# Altium PCB zynq_dev_V1.PcbDoc (part 2 of 2)
Units mil, origin at the board's own origin, x right, y up, seen from the top; angles counter-clockwise.
Board outline 6000 x 4000 mil, 9 copper layers (Component Side, Ground Plane 1 (GND), Inner Layer 1, Inner Layer 2, Power Plane (VCC), Inner Layer 3, Mid-Layer 4, Ground Plane 2 (GND), Solder Side), stack 82.902 mil thick; 303 components, 162 nets, 1398 pads, 550 vias.
Unrouted connection lines stored in the file: 7.
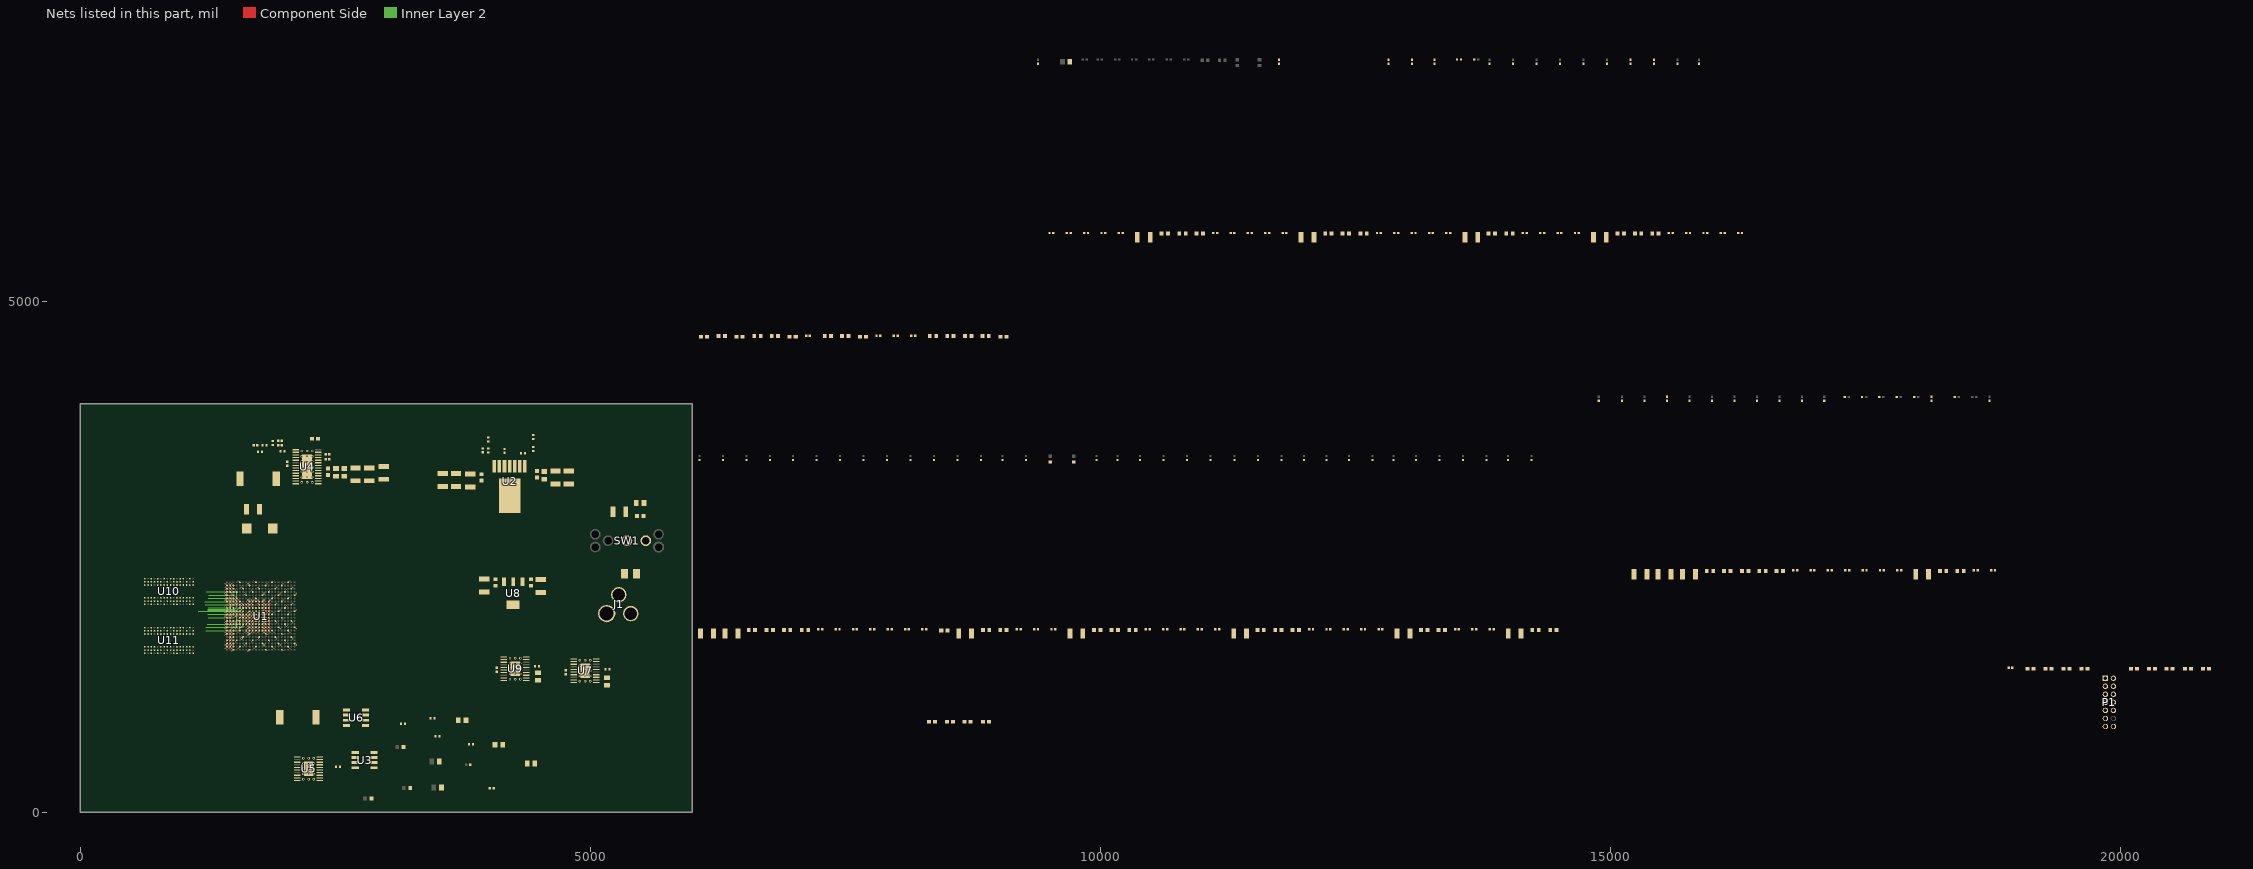
[diagram p6: the nets of this part, all layers, seen from the top]

## Via types
v1: diameter 16, hole 6, Component Side to Solder Side, 484 vias
v2: diameter 23.62, hole 11.81, Component Side to Solder Side, 66 vias

## Nets (pads, with @x,y where several pads share a name; then routed paths per layer and width w, separated by ;. In a path a pad name is that pad's centre, name@x,y a point inside that pad or via, vN(x,y) a via of type N, cw(c..) or ccw(c..) an arc to the next point about the centre after c; other vN are vias at no path point) (continued)
DDR3-A1: R4.1 U1.M5 U10.P7 U11.P7 | length 425.1
  Component Side w7: v1(1551.18,1889.76) U1.M5@1566.93,1905.51
  Inner Layer 2 w5: 1232.28,1811.02 1350.39,1811.02 1525.86,1811.02 1535.68,1820.85 1535.68,1833.19 1544.76,1842.27 1557.11,1842.27 1566.68,1851.85 1566.68,1864.69 1551.18,1880.19 v1(1551.18,1889.76)
DDR3-A2: R5.1 U1.K4 U10.P3 U11.P3 | length 296.3
  Component Side w7: v1(1519.69,1952.76) U1.K4@1535.43,1968.5
  Inner Layer 2 w5: 1252.22,1937.01 1494.36,1937.01 1510.11,1952.76 v1(1519.69,1952.76)
DDR3-A3: R6.1 U1.L4 U10.N2 U11.N2 | length 292.6
  Component Side w7: v1(1519.69,1921.26) U1.L4@1535.43,1937.01
  Inner Layer 2 w5: 1255.91,1905.51 1503.94,1905.51 v1(1519.69,1921.26)
DDR3-A4: R7.1 U1.K6 U10.P8 U11.P8 | length 551.1
  Component Side w7: v1(1582.68,1952.76) U1.K6@1598.43,1968.5
  Inner Layer 2 w5: 1232.28,1779.53 1557.35,1779.53 1566.68,1788.86 1566.68,1801.2 1576.75,1811.27 1589.1,1811.27 1598.18,1820.35 1598.18,1927.68 1582.68,1943.18 v1(1582.68,1952.76)
DDR3-A5: R8.1 U1.K5 U10.P2 U11.P2 | length 420.8
  Component Side w7: v1(1551.18,1952.76) U1.K5@1566.93,1968.5
  Inner Layer 2 w5: 1248.03,1842.52 1525.86,1842.52 1535.19,1851.85 1535.19,1936.76 v1(1551.18,1952.76)
DDR3-A6: R9.1 U1.J7 U10.R8 U11.R8 | length 498.5
  Component Side w7: v1(1614.17,2015.75) U1.J7@1629.92,2000
  Inner Layer 2 w5: 1157.48,1968.5 1566.93,1968.5 v1(1614.17,2015.75)
DDR3-A7: R11.1 U1.J6 U10.R2 U11.R2 | length 367.8
  Component Side w7: v1(1582.68,2015.75) U1.J6@1598.43,2000
  Inner Layer 2 w5: 1251.9,1980.25 1537.6,1980.25 1573.1,2015.75 v1(1582.68,2015.75)
DDR3-A8: R12.1 U1.J5 U10.T8 U11.T8 | length 332
  Component Side w7: v1(1551.18,2015.75) U1.J5@1566.93,2000
  Inner Layer 2 w5: 1252.01,1990.25 1516.11,1990.25 1541.61,2015.75 v1(1551.18,2015.75)
DDR3-A9: R13.1 U1.H5 U10.R3 U11.R3 | length 351.3
  Component Side w7: v1(1551.18,2047.24) U1.H5@1566.93,2031.5
  Inner Layer 2 w5: 1228.59,2031.74 1526.11,2031.74 1541.61,2047.24 v1(1551.18,2047.24)
DDR3-A10: R14.1 U1.J3 U10.L7 U11.L7 | length 260.7
  Component Side w7: v1(1488.19,2015.75) U1.J3@1503.94,2000
  Inner Layer 2 w5: 1256.15,2000.25 1463.11,2000.25 1478.61,2015.75 v1(1488.19,2015.75)
DDR3-A11: R15.1 U1.G5 U10.R7 U11.R7 | length 401.1
  Component Side w7: v1(1551.18,2078.74) U1.G5@1566.93,2062.99
  Inner Layer 2 w5: 1236.22,2157.48 1525.86,2157.48 1535.19,2148.15 1535.19,2094.74 v1(1551.18,2078.74)
DDR3-A12: R16.1 U1.H4 U10.N7 U11.N7 | length 324.1
  Component Side w7: v1(1519.69,2047.24) U1.H4@1535.43,2031.5
  Inner Layer 2 w5: 1224.41,2062.99 1503.94,2062.99 v1(1519.69,2047.24)
DDR3-A13: R17.1 U1.F4 U10.T3 U11.T3 | length 288.6
  Component Side w7: v1(1519.69,2110.24) U1.F4@1535.43,2094.49
  Inner Layer 2 w5: 1259.84,2125.98 1503.94,2125.98 v1(1519.69,2110.24)
DDR3-A14: R18.1 U1.G4 U10.T7 U11.T7 | length 292.6
  Component Side w7: v1(1519.69,2078.74) U1.G4@1535.43,2062.99
  Inner Layer 2 w5: 1255.91,2094.49 1503.94,2094.49 v1(1519.69,2078.74)
DDR3-BA0: R28.1 U1.L7 U10.M2 U11.M2 | length 22.3
  Component Side w7: v1(1614.17,1921.26) U1.L7@1629.92,1937.01
DDR3-BA1: R26.1 U1.L6 U10.N8 U11.N8 | length 22.3
  Component Side w7: v1(1582.68,1921.26) U1.L6@1598.43,1937.01
DDR3-BA2: R25.1 U1.M6 U10.M3 U11.M3 | length 22.3
  Component Side w7: v1(1582.68,1889.76) U1.M6@1598.43,1905.51
DDR3-CAS: R21.1 U1.P3 U10.K3 U11.K3 | length 22.3
  Component Side w7: v1(1488.19,1826.77) U1.P3@1503.94,1842.52
DDR3-CKE0: R1.1 U1.V3 U10.K9 U11.K9 | length 22.3
  Component Side w7: v1(1488.19,1700.79) U1.V3@1503.94,1716.54
DDR3-CLK0_N: R30.1 U1.N5 U10.K7 U11.K7 | length 22.3
  Component Side w7: v1(1551.18,1858.27) U1.N5@1566.93,1874.02
DDR3-CLK0_P: R30.2 U1.N4 U10.J7 U11.J7 | length 22.3
  Component Side w7: v1(1519.69,1858.27) U1.N4@1535.43,1874.02
DDR3-D0: U1.D1 U10.E3 | length 22.3
  Component Side w7: v1(1425.2,2173.23) U1.D1@1440.94,2157.48
DDR3-D1: U1.C3 U10.F7 | length 22.3
  Component Side w7: v1(1488.19,2204.72) U1.C3@1503.94,2188.98
DDR3-D2: U1.B2 U10.F2 | length 22.3
  Component Side w7: v1(1456.69,2236.22) U1.B2@1472.44,2220.47
DDR3-D3: U1.D3 U10.F8 | length 22.3
  Component Side w7: v1(1488.19,2173.23) U1.D3@1503.94,2157.48
DDR3-D4: U1.E3 U10.H3 | length 22.3
  Component Side w7: v1(1488.19,2141.73) U1.E3@1503.94,2125.98
DDR3-D5: U1.E1 U10.H8 | length 22.3
  Component Side w7: v1(1425.2,2141.73) U1.E1@1440.94,2125.98
DDR3-D6: U1.F2 U10.G2 | length 22.3
  Component Side w7: v1(1456.69,2110.24) U1.F2@1472.44,2094.49
DDR3-D7: U1.F1 U10.H7 | length 22.3
  Component Side w7: v1(1425.2,2110.24) U1.F1@1440.94,2094.49
DDR3-D8: U1.G2 U10.D7 | length 22.3
  Component Side w7: v1(1456.69,2078.74) U1.G2@1472.44,2062.99
DDR3-D9: U1.G1 U10.C3 | length 22.3
  Component Side w7: v1(1425.2,2078.74) U1.G1@1440.94,2062.99
DDR3-D10: U1.L1 U10.C8 | length 22.3
  Component Side w7: v1(1425.2,1921.26) U1.L1@1440.94,1937.01
DDR3-D11: U1.L2 U10.C2 | length 22.3
  Component Side w7: v1(1456.69,1921.26) U1.L2@1472.44,1937.01
DDR3-D12: U1.L3 U10.A7 | length 22.3
  Component Side w7: v1(1488.19,1921.26) U1.L3@1503.94,1937.01
DDR3-D13: U1.K1 U10.A2 | length 22.3
  Component Side w7: v1(1425.2,1952.76) U1.K1@1440.94,1968.5
DDR3-D14: U1.J1 U10.B8 | length 22.3
  Component Side w7: v1(1425.2,2015.75) U1.J1@1440.94,2000
DDR3-D15: U1.K3 U10.A3 | length 22.3
  Component Side w7: v1(1488.19,1952.76) U1.K3@1503.94,1968.5
DDR3-D16: U1.M1 U11.E3 | length 22.3
  Component Side w7: v1(1425.2,1889.76) U1.M1@1440.94,1905.51
DDR3-D17: U1.T3 U11.F7 | length 22.3
  Component Side w7: v1(1488.19,1763.78) U1.T3@1503.94,1779.53
DDR3-D18: U1.N3 U11.F2 | length 22.3
  Component Side w7: v1(1488.19,1858.27) U1.N3@1503.94,1874.02
DDR3-D19: U1.T1 U11.F8 | length 22.3
  Component Side w7: v1(1425.2,1763.78) U1.T1@1440.94,1779.53
DDR3-D20: U1.R3 U11.H3 | length 22.3
  Component Side w7: v1(1488.19,1795.28) U1.R3@1503.94,1811.02
DDR3-D21: U1.T2 U11.H8 | length 22.3
  Component Side w7: v1(1456.69,1763.78) U1.T2@1472.44,1779.53
DDR3-D22: U1.M2 U11.G2 | length 22.3
  Component Side w7: v1(1456.69,1889.76) U1.M2@1472.44,1905.51
DDR3-D23: U1.R1 U11.H7 | length 22.3
  Component Side w7: v1(1425.2,1795.28) U1.R1@1440.94,1811.02
DDR3-D24: U1.AA3 U11.D7 | length 22.3
  Component Side w7: v1(1488.19,1606.3) U1.AA3@1503.94,1622.05
DDR3-D25: U1.U1 U11.C3 | length 22.3
  Component Side w7: v1(1425.2,1732.28) U1.U1@1440.94,1748.03
DDR3-D26: U1.AA1 U11.C8 | length 22.3
  Component Side w7: v1(1425.2,1606.3) U1.AA1@1440.94,1622.05
DDR3-D27: U1.U2 U11.C2 | length 22.3
  Component Side w7: v1(1456.69,1732.28) U1.U2@1472.44,1748.03
DDR3-D28: U1.W1 U11.A7 | length 22.3
  Component Side w7: v1(1425.2,1669.29) U1.W1@1440.94,1685.04
DDR3-D29: U1.Y3 U11.A2 | length 22.3
  Component Side w7: v1(1488.19,1637.8) U1.Y3@1503.94,1653.54
DDR3-D30: U1.W3 U11.B8 | length 22.3
  Component Side w7: v1(1488.19,1669.29) U1.W3@1503.94,1685.04
DDR3-D31: U1.Y1 U11.A3 | length 22.3
  Component Side w7: v1(1425.2,1637.8) U1.Y1@1440.94,1653.54
DDR3-DM0: U1.B1 U10.E7 | length 22.3
  Component Side w7: v1(1425.2,2236.22) U1.B1@1440.94,2220.47
DDR3-DM1: U1.H3 U10.D3 | length 22.3
  Component Side w7: v1(1488.19,2047.24) U1.H3@1503.94,2031.5
DDR3-DM2: U1.P1 U11.E7 | length 22.3
  Component Side w7: v1(1425.2,1826.77) U1.P1@1440.94,1842.52
DDR3-DM3: U1.AA2 U11.D3 | length 22.3
  Component Side w7: v1(1456.69,1606.3) U1.AA2@1472.44,1622.05
DDR3-DQS0_N: U1.D2 U10.G3 | length 22.3
  Component Side w7: v1(1456.69,2173.23) U1.D2@1472.44,2157.48
DDR3-DQS0_P: U1.C2 U10.F3 | length 22.3
  Component Side w7: v1(1456.69,2204.72) U1.C2@1472.44,2188.98
DDR3-DQS1_N: U1.J2 U10.B7 | length 22.3
  Component Side w7: v1(1456.69,2015.75) U1.J2@1472.44,2000
DDR3-DQS1_P: U1.H2 U10.C7 | length 22.3
  Component Side w7: v1(1456.69,2047.24) U1.H2@1472.44,2031.5
DDR3-DQS2_N: U1.P2 U11.G3 | length 22.3
  Component Side w7: v1(1456.69,1826.77) U1.P2@1472.44,1842.52
DDR3-DQS2_P: U1.N2 U11.F3 | length 22.3
  Component Side w7: v1(1456.69,1858.27) U1.N2@1472.44,1874.02
DDR3-DQS3_N: U1.W2 U11.B7 | length 22.3
  Component Side w7: v1(1456.69,1669.29) U1.W2@1472.44,1685.04
DDR3-DQS3_P: U1.V2 U11.C7 | length 22.3
  Component Side w7: v1(1456.69,1700.79) U1.V2@1472.44,1716.54
DDR3-ODT0: R23.1 U1.P5 U10.K1 U11.K1 | length 22.3
  Component Side w7: v1(1551.18,1826.77) U1.P5@1566.93,1842.52
DDR3-RAS: R20.1 U1.R5 U10.J3 U11.J3 | length 22.3
  Component Side w7: v1(1551.18,1795.28) U1.R5@1566.93,1811.02
DDR3-RESET: R2.1 U1.F3 U10.T2 U11.T2 | length 22.3
  Component Side w7: v1(1488.19,2110.24) U1.F3@1503.94,2094.49
DDR3-S0: R19.1 U1.P6 U10.L2 U11.L2 | length 22.3
  Component Side w7: v1(1582.68,1826.77) U1.P6@1598.43,1842.52
DDR3-WE: R22.1 U1.R4 U10.L3 U11.L3 | length 22.3
  Component Side w7: v1(1519.69,1795.28) U1.R4@1535.43,1811.02
DDRVREF: C12.2 C13.2 C38.1 C39.1 C48.2 C49.2 U1.H7 U1.P7 U10.H1 U10.M8 U11.H1 U11.M8 | length 44.5
  Component Side w7: v1(1614.17,1826.77) U1.P7@1629.92,1842.52 ; v1(1614.17,2047.24) U1.H7@1629.92,2031.5
GND: C12.1 C13.1 C14.1 C15.1 C16.1 C17.1 C18.1 C19.1 C20.1 C21.1 C22.1 C23.1 C24.1 C25.1 C26.1 C27.1 C28.1 C29.1 C30.1 C31.1 C32.1 C33.1 C34.1 C35.1 C36.1 C37.1 C40.1 C41.1 C42.1 C43.1 C44.1 C45.1 C46.1 C47.1 C48.1 C49.1 C50.1 C51.1 C52.1 C53.1 C54.1 C55.1 C56.2 C57.2 C58.2 C59.2 C60.2 C61.2 C62.2 C63.2 C64.2 C65.2 C66.2 C67.2 C68.2 C69.2 C70.2 C71.2 C72.2 C73.2 C74.2 C75.2 C76.2 C77.2 C78.2 C79.2 C80.2 C81.2 C82.2 C83.2 C84.2 C85.2 C86.2 C87.2 C88.2 C89.2 C90.2 C91.2 C92.2 C93.2 C94.2 C95.2 C96.2 C97.2 C98.2 C99.2 C100.2 C101.2 C102.2 C103.2 C104.2 C105.2 C106.2 C107.2 C108.2 C109.2 C110.2 C111.2 C112.2 C113.2 C114.2 C115.2 C116.2 C117.2 C118.2 C119.2 C120.2 C121.2 C122.2 C123.2 C124.2 C125.2 C126.2 C127.2 C128.2 C129.2 C130.2 C131.2 C132.2 C133.2 C134.2 C135.2 C136.2 C137.2 C138.2 C139.2 C140.2 C141.2 C142.2 C143.2 C144.2 C145.2 C146.2 C147.2 C148.2 C149.2 C150.2 C151.2 C152.2 C153.2 C154.2 C155.2 C156.2 C157.2 C158.2 C159.2 C160.2 C161.2 C162.2 C163.2 C164.2 C165.2 C167.2 C168.2 C169.2 C170.2 C171.2 C172.2 C173.2 C174.2 C175.2 C176.2 C177.2 C179.1 C180.2 C181.2 C182.2 C183.2 C184.2 C185.2 C187.2 C192.2 C193.2 C194.2 C196.2 C197.2 C198.2 C199.2 C200.2 C201.2 C202.1 C203.1 C204.1 C205.1 C206.2 C207.2 C208.2 C209.2 C210.2 C211.2 C212.2 C213.2 C214.2 C215.2 C216.2 C217.2 C218.2 C219.2 C220.2 J1.2 J1.3 P1.1 P1.3 P1.5 P1.7 P1.9 P1.11 P1.13 R2.2 R10.2 R24.2 R29.2 R41.2 R42.2 R43.2 R44.1 R47.1 R48.1 R56.1 R59.1 R68.1 U1.A5 U1.A15 U1.AA5 U1.AA15 U1.AB8 U1.AB18 U1.B8 U1.B18 U1.C1 U1.C11 U1.C21 U1.D4 U1.D14 U1.E7 U1.E17 U1.F10 U1.F20 U1.G3 U1.G10 U1.H6 U1.H8 U1.H12 U1.H14 U1.H16 U1.J9 U1.J11 U1.J13 U1.J19 U1.K2 U1.K8 U1.K10 U1.K14 U1.K22 U1.L5 U1.L9 U1.L11 U1.L13 U1.L15 U1.M8 U1.M10 U1.M12 U1.M14 U1.M18 U1.N1 U1.N9 U1.N13 U1.N21 U1.P4 U1.P8 U1.P10 U1.P12 U1.P14 U1.R9 U1.R11 U1.R13 U1.R17 U1.T20 U1.U3 U1.U13 U1.V6 U1.V16 U1.W9 U1.W19 U1.Y2 U1.Y12 U1.Y22 U2.4 U2.8 U4.1 U4.15 U4.16 U4.17 U4.18 U4.19 U4.29 U5.3 U5.5 U5.6 U5.16 U5.21 U6.1 U6.2 U6.3 U7.1 U7.2 U7.3 U7.5 U7.9 U7.10 U7.11 U7.12 U7.19 U7.20 U7.21 U8.2 U8.4 U9.1 U9.2 U9.3 U9.5 U9.9 U9.10 U9.11 U9.12 U9.19 U9.20 U9.21 U10.A9 U10.B1 U10.B3 U10.B9 U10.D1 U10.D8 U10.E1 U10.E2 U10.E8 U10.F9 U10.G1 U10.G8 U10.G9 U10.J2 U10.J8 U10.M1 U10.M9 U10.P1 U10.P9 U10.T1 U10.T9 U11.A9 U11.B1 U11.B3 U11.B9 U11.D1 U11.D8 U11.E1 U11.E2 U11.E8 U11.F9 U11.G1 U11.G8 U11.G9 U11.J2 U11.J8 U11.M1 U11.M9 U11.P1 U11.P9 U11.T1 U11.T9 | length 1469.9
  Component Side w7: v1(1425.2,1858.27) U1.N1@1440.94,1874.02 ; v1(1425.2,2204.72) U1.C1@1440.94,2188.98 ; v1(1456.69,1637.8) U1.Y2@1472.44,1653.54 ; v1(1456.69,1952.76) U1.K2@1472.44,1968.5 ; v1(1488.19,1732.28) U1.U3@1503.94,1748.03 ; v1(1488.19,2078.74) U1.G3@1503.94,2062.99 ; v1(1519.69,1826.77) U1.P4@1535.43,1842.52 ; v1(1519.69,2173.23) U1.D4@1535.43,2157.48 ; v1(1551.18,1606.3) U1.AA5@1566.93,1622.05 ; v1(1551.18,1921.26) U1.L5@1566.93,1937.01 ; v1(1551.18,2267.72) U1.A5@1566.93,2251.97 ; v1(1582.68,1700.79) U1.V6@1598.43,1716.54 ; v1(1582.68,2047.24) U1.H6@1598.43,2031.5 ; v1(1614.17,2141.73) U1.E7@1629.92,2125.98 ; v1(1645.67,1574.8) U1.AB8@1661.42,1590.55 ; v1(1645.67,1826.77) U1.P8@1661.42,1842.52 ; v1(1645.67,1889.76) U1.M8@1661.42,1905.51 ; v1(1645.67,1952.76) U1.K8@1661.42,1968.5 ; v1(1645.67,2047.24) U1.H8@1661.42,2031.5 ; v1(1645.67,2236.22) U1.B8@1661.42,2220.47 ; v1(1677.17,1669.29) U1.W9@1692.91,1685.04 ; v1(1677.17,1795.28) U1.R9@1692.91,1811.02 ; v1(1677.17,1858.27) U1.N9@1692.91,1874.02 ; v1(1677.17,1921.26) U1.L9@1692.91,1937.01 ; v1(1677.17,2015.75) U1.J9@1692.91,2000 ; v1(1708.66,1826.77) U1.P10@1724.41,1842.52 ; v1(1708.66,1889.76) U1.M10@1724.41,1905.51 ; v1(1708.66,1952.76) U1.K10@1724.41,1968.5 ; v1(1708.66,2078.74) U1.G10@1724.41,2062.99 ; v1(1708.66,2110.24) U1.F10@1724.41,2094.49 ; v1(1740.16,1795.28) U1.R11@1755.91,1811.02 ; v1(1740.16,1921.26) U1.L11@1755.91,1937.01 ; v1(1740.16,2015.75) U1.J11@1755.91,2000 ; v1(1740.16,2204.72) U1.C11@1755.91,2188.98 ; U1.Y12@1787.4,1653.54 v1(1803.15,1637.8) ; U1.P12@1787.4,1842.52 v1(1803.15,1826.77) ; U1.M12@1787.4,1905.51 v1(1803.15,1889.76) ; U1.H12@1787.4,2031.5 v1(1803.15,2047.24) ; U1.U13@1818.9,1748.03 v1(1834.65,1732.28) ; U1.R13@1818.9,1811.02 v1(1834.65,1795.28) ; U1.N13@1818.9,1874.02 v1(1834.65,1858.27) ; U1.L13@1818.9,1937.01 v1(1834.65,1952.76) ; U1.J13@1818.9,2000 v1(1834.65,2015.75) ; U1.P14@1850.39,1842.52 v1(1866.14,1826.77) ; U1.M14@1850.39,1905.51 v1(1866.14,1889.76) ; U1.K14@1850.39,1968.5 v1(1866.14,1984.25) ; U1.H14@1850.39,2031.5 v1(1866.14,2047.24) ; U1.D14@1850.39,2157.48 v1(1866.14,2173.23) ; U1.AA15@1881.89,1622.05 v1(1897.64,1606.3) ; U1.L15@1881.89,1937.01 v1(1897.64,1952.76) ; U1.A15@1881.89,2251.97 v1(1897.64,2267.72) ; U1.V16@1913.39,1716.54 v1(1929.13,1700.79) ; U1.H16@1913.39,2031.5 v1(1929.13,2047.24) ; U1.R17@1944.88,1811.02 v1(1960.63,1795.28) ; U1.E17@1944.88,2125.98 v1(1960.63,2141.73) ; U1.AB18@1976.38,1590.55 v1(1992.13,1574.8) ; U1.M18@1976.38,1905.51 v1(1992.13,1889.76) ; U1.B18@1976.38,2220.47 v1(1992.13,2236.22) ; U1.W19@2007.87,1685.04 v1(2023.62,1669.29) ; U1.J19@2007.87,2000 v1(2023.62,2015.75) ; U1.T20@2039.37,1779.53 v1(2055.12,1763.78) ; U1.F20@2039.37,2094.49 v1(2055.12,2110.24) ; U1.N21@2070.87,1874.02 v1(2086.61,1858.27) ; U1.C21@2070.87,2188.98 v1(2086.61,2204.72) ; U1.Y22@2102.36,1653.54 v1(2118.11,1637.8) ; U1.K22@2102.36,1968.5 v1(2118.11,1984.25)
  other v2: 2188.82,322.64 2240,322.64 2291.18,322.64 2188.82,373.82 2240,373.82 2291.18,373.82 2188.82,425 2240,425 2291.18,425 2188.82,476.18 2240,476.18 2291.18,476.18 2188.82,527.36 2240,527.36 2291.18,527.36 4898.82,1282.64 4950,1282.64 5001.18,1282.64 4213.82,1302.64 4265,1302.64 4316.18,1302.64 4898.82,1333.82 4950,1333.82 5001.18,1333.82 4213.82,1353.82 4265,1353.82 4316.18,1353.82 4898.82,1385 4950,1385 5001.18,1385 4213.82,1405 4265,1405 4316.18,1405 4898.82,1436.18 4950,1436.18 5001.18,1436.18 4213.82,1456.18 4265,1456.18 4316.18,1456.18 4898.82,1487.36 4950,1487.36 5001.18,1487.36 4213.82,1507.36 4265,1507.36 4316.18,1507.36 2173.82,3231.46 2225,3231.46 2276.18,3231.46 2173.82,3282.64 2225,3282.64 2276.18,3282.64 2173.82,3333.82 2225,3333.82 2276.18,3333.82 2173.82,3385 2225,3385 2276.18,3385 2173.82,3436.18 2225,3436.18 2276.18,3436.18 2173.82,3487.36 2225,3487.36 2276.18,3487.36 2173.82,3538.54 2225,3538.54 2276.18,3538.54
NetC166_2: C166.2 R46.1 R48.2 U2.6
NetC171_1: C171.1 U2.5
NetC178_2: C178.2 U5.20
NetC186_2: C186.2 R55.2
NetC190_1: C190.1 L1.1 U4.7 U4.8 U4.9 U4.10 U4.11 U4.12 U4.13 U4.14
NetC190_2: C190.2 U4.5
NetC191_1: C191.1 R58.2
NetC191_2: C191.2 C195.2 U4.3
NetC193_1: C193.1 U4.26
NetC194_1: C194.1 U4.25
NetC195_1: C195.1 R53.1 R55.1 R58.1 R59.2 U4.2
NetC210_1: C210.1 C211.1 C212.1 C213.1
NetC220_1: C220.1
NetD1_1: R62.1
NetD2_1: R64.2
NetD2_2: 
NetD3_1: R67.2
NetD3_2: 
NetH1_3: R62.2
NetJ2_1: 
NetJ2_2: R63.1
NetJ2_5: 
NetJ2_7: 
NetJ2_8: 
NetJ2_9: 
NetJ2_CD: R65.1
NetJ2_WP: R66.1
NetR10_1: R10.1 U10.L8
NetR24_1: R24.1 U1.N7 | length 22.3
  Component Side w7: v1(1614.17,1858.27) U1.N7@1629.92,1874.02
NetR27_1: R27.1 U1.M7 | length 22.3
  Component Side w7: v1(1614.17,1889.76) U1.M7@1629.92,1905.51
NetR29_1: R29.1 U11.L8
NetR39_2: R39.2 U1.T14 | length 22.3
  Component Side w7: U1.T14@1850.39,1779.53 v1(1866.14,1763.78)
NetR40_2: R40.2 R41.1 U1.T13 | length 22.3
  Component Side w7: U1.T13@1818.9,1779.53 v1(1834.65,1763.78)
NetR42_1: R42.1 U1.N11 | length 22.3
  Component Side w7: v1(1740.16,1858.27) U1.N11@1755.91,1874.02
NetR43_1: R43.1 U1.N12 | length 22.3
  Component Side w7: U1.N12@1787.4,1874.02 v1(1803.15,1858.27)
NetR45_1: R45.1 R47.2 U2.3
NetR49_1: R49.1 U2.2
NetR50_1: R50.1 U5.19
NetR50_2: R50.2 U3.4
NetR51_1: R51.1 R56.2 U5.10
NetR54_1: R54.1 U5.17
NetR54_2: R54.2 U6.4
NetR57_2: R57.2 U5.15
NetR60_1: R60.1 U7.16
NetR61_1: R61.1 U9.16
NetR68_2: R68.2
NetU12_2: 
NetU12_3: 
NetU13_1: 
NetU13_3: 
NetU13_5: 
NetU13_11: 
NetU14_1: 
NetU14_3: 
NetU14_4: 
NetU14_6: 
NetU14_7: 
NetU14_9: 
PL_DONE: U1.T12 | length 22.3
  Component Side w7: U1.T12@1787.4,1779.53 v1(1803.15,1763.78)
PROG: U1.T11 | length 22.3
  Component Side w7: v1(1740.16,1763.78) U1.T11@1755.91,1779.53
PROG-RST: P1.14
PWR-GOOD: U5.13
SD_CD: R65.2
SD_WP: R66.2
SW-1V5: C178.1 L2.1 U3.1 U3.2 U3.3 U5.18 U6.5 U6.6 U6.7 U6.8
TCK: R34.1 R37.1 U1.G11 | length 22.3
  Component Side w7: v1(1740.16,2078.74) U1.G11@1755.91,2062.99
TCK-JTAG: P1.6 R37.2
TDI: R33.1 R35.1 U1.H13 | length 22.3
  Component Side w7: U1.H13@1818.9,2031.5 v1(1834.65,2047.24)
TDI-JTAG: P1.10 R35.2
TDO: R31.1 R36.1 U1.G14 | length 22.3
  Component Side w7: U1.G14@1850.39,2062.99 v1(1866.14,2078.74)
TDO-JTAG: P1.8 R36.2
TMS: R32.1 R38.1 U1.G12 | length 22.3
  Component Side w7: U1.G12@1787.4,2062.99 v1(1803.15,2078.74)
TMS-JTAG: P1.4 R38.2
VCC1V0: C56.1 C57.1 C58.1 C59.1 C60.1 C61.1 C62.1 C63.1 C64.1 C65.1 C66.1 C67.1 C68.1 C69.1 C70.1 C71.1 C72.1 C73.1 C74.1 C75.1 C76.1 C77.1 C78.1 C79.1 C80.1 C81.1 C82.1 C83.1 C84.1 C85.1 C149.1 C150.1 C151.1 C152.1 C153.1 C154.1 C155.1 C156.1 C157.1 C158.1 C159.1 C160.1 C161.1 C179.2 C186.1 C187.1 L1.2 R53.2 U1.G8 U1.H9 U1.H11 U1.J8 U1.J10 U1.J12 U1.J14 U1.K13 U1.L8 U1.L14 U1.M13 U1.N8 U1.N14 U1.P13 U1.R8 U1.R14 | length 356.3
  Component Side w7: v1(1645.67,1795.28) U1.R8@1661.42,1811.02 ; v1(1645.67,1858.27) U1.N8@1661.42,1874.02 ; v1(1645.67,1921.26) U1.L8@1661.42,1937.01 ; v1(1645.67,2015.75) U1.J8@1661.42,2000 ; v1(1645.67,2078.74) U1.G8@1661.42,2062.99 ; v1(1677.17,2047.24) U1.H9@1692.91,2031.5 ; v1(1708.66,2015.75) U1.J10@1724.41,2000 ; v1(1740.16,2047.24) U1.H11@1755.91,2031.5 ; U1.J12@1787.4,2000 v1(1803.15,2015.75) ; U1.P13@1818.9,1842.52 v1(1834.65,1826.77) ; U1.M13@1818.9,1905.51 v1(1834.65,1889.76) ; U1.K13@1818.9,1968.5 v1(1834.65,1984.25) ; U1.R14@1850.39,1811.02 v1(1866.14,1795.28) ; U1.N14@1850.39,1874.02 v1(1866.14,1858.27) ; U1.L14@1850.39,1937.01 v1(1866.14,1952.76) ; U1.J14@1850.39,2000 v1(1866.14,2015.75)
VCC1V5: FB1.2 L2.2 R51.2 U5.1 U5.9
VCC1V8: C86.1 C87.1 C88.1 C89.1 C90.1 C91.1 C92.1 C108.1 C109.1 C110.1 C111.1 C112.1 C113.1 C114.1 C115.1 C209.1 C214.1 C215.1 U1.G9 U1.K9 U1.L10 U1.M9 U1.N10 U1.P9 U1.P11 U1.R10 U1.T9 U9.13 U9.14 | length 200.4
  Component Side w7: v1(1677.17,1763.78) U1.T9@1692.91,1779.53 ; v1(1677.17,1826.77) U1.P9@1692.91,1842.52 ; v1(1677.17,1889.76) U1.M9@1692.91,1905.51 ; v1(1677.17,1952.76) U1.K9@1692.91,1968.5 ; v1(1677.17,2078.74) U1.G9@1692.91,2062.99 ; v1(1708.66,1795.28) U1.R10@1724.41,1811.02 ; v1(1708.66,1858.27) U1.N10@1724.41,1874.02 ; v1(1708.66,1921.26) U1.L10@1724.41,1937.01 ; v1(1740.16,1826.77) U1.P11@1755.91,1842.52
VCC2V5: C208.1 U7.13 U7.14
VCC3V3: C93.1 C94.1 C95.1 C96.1 C97.1 C98.1 C99.1 C100.1 C101.1 C102.1 C103.1 C104.1 C105.1 C106.1 C107.1 C116.1 C117.1 C118.1 C119.1 C120.1 C121.1 C122.1 C123.1 C124.1 C125.1 C126.1 C127.1 C128.1 C129.1 C130.1 C131.1 C132.1 C133.1 C134.1 C135.1 C136.1 C137.1 C138.1 C139.1 C140.1 C141.1 C142.1 C143.1 C144.1 C145.1 C146.1 C147.1 C148.1 C204.2 C205.2 C216.1 C217.1 C218.1 C219.1 P1.2 R31.2 R32.2 R33.2 R34.2 R39.1 R40.1 R63.2 U1.A10 U1.A20 U1.AA10 U1.AA20 U1.AB3 U1.AB13 U1.B3 U1.B13 U1.C6 U1.C16 U1.D9 U1.D19 U1.E12 U1.E22 U1.F15 U1.G18 U1.H21 U1.K17 U1.L20 U1.N16 U1.P19 U1.R12 U1.R22 U1.T5 U1.T7 U1.T8 U1.T10 U1.T15 U1.U8 U1.U18 U1.V11 U1.V21 U1.W4 U1.W14 U1.Y7 U1.Y17 U8.3 | length 801.8
  Component Side w7: v1(1488.19,1574.8) U1.AB3@1503.94,1590.55 ; v1(1488.19,2236.22) U1.B3@1503.94,2220.47 ; v1(1519.69,1669.29) U1.W4@1535.43,1685.04 ; v1(1551.18,1763.78) U1.T5@1566.93,1779.53 ; v1(1582.68,2204.72) U1.C6@1598.43,2188.98 ; v1(1614.17,1637.8) U1.Y7@1629.92,1653.54 ; v1(1614.17,1763.78) U1.T7@1629.92,1779.53 ; v1(1645.67,1732.28) U1.U8@1661.42,1748.03 ; v1(1645.67,1763.78) U1.T8@1661.42,1779.53 ; v1(1677.17,2173.23) U1.D9@1692.91,2157.48 ; v1(1708.66,1606.3) U1.AA10@1724.41,1622.05 ; v1(1708.66,1763.78) U1.T10@1724.41,1779.53 ; v1(1708.66,2267.72) U1.A10@1724.41,2251.97 ; v1(1740.16,1700.79) U1.V11@1755.91,1716.54 ; U1.R12@1787.4,1811.02 v1(1803.15,1795.28) ; U1.E12@1787.4,2125.98 v1(1803.15,2141.73) ; U1.AB13@1818.9,1590.55 v1(1834.65,1574.8) ; U1.B13@1818.9,2220.47 v1(1834.65,2236.22) ; U1.W14@1850.39,1685.04 v1(1866.14,1669.29) ; U1.T15@1881.89,1779.53 v1(1897.64,1763.78) ; U1.F15@1881.89,2094.49 v1(1897.64,2110.24) ; U1.N16@1913.39,1874.02 v1(1929.13,1858.27) ; U1.C16@1913.39,2188.98 v1(1929.13,2204.72) ; U1.Y17@1944.88,1653.54 v1(1960.63,1637.8) ; U1.K17@1944.88,1968.5 v1(1960.63,1984.25) ; U1.U18@1976.38,1748.03 v1(1992.13,1732.28) ; U1.G18@1976.38,2062.99 v1(1992.13,2078.74) ; U1.P19@2007.87,1842.52 v1(2023.62,1826.77) ; U1.D19@2007.87,2157.48 v1(2023.62,2173.23) ; U1.AA20@2039.37,1622.05 v1(2055.12,1606.3) ; U1.L20@2039.37,1937.01 v1(2055.12,1952.76) ; U1.A20@2039.37,2251.97 v1(2055.12,2267.72) ; U1.V21@2070.87,1716.54 v1(2086.61,1700.79) ; U1.H21@2070.87,2031.5 v1(2086.61,2047.24) ; U1.R22@2102.36,1811.02 v1(2118.11,1795.28) ; U1.E22@2102.36,2125.98 v1(2118.11,2141.73)
VCC3V3-A: C206.1 R61.2 U9.6 U9.7
VCC3V3-A-EN: R52.1 U4.4
VCC3V3-B: C207.1 R60.2 U7.6 U7.7
VCC3V3-B-EN: U5.11 U5.12
VCC5V0: C166.1 C167.1 C168.1 C169.1 C170.1 C176.1 C177.1 C180.1 C181.1 C182.1 C183.1 C184.1 C185.1 C201.1 C202.2 C203.2 R46.2 R52.2 R57.1 R64.1 R67.1 U2.7 U3.5 U3.6 U3.7 U3.8 U4.20 U4.21 U4.22 U4.23 U4.24 U4.27 U5.8 U5.14 U8.1
VCC_IN: C162.1 C163.1 C164.1 C165.1 C172.1 C173.1 C174.1 R45.2 R49.2 SW1.2 U2.1
VCC_JACK: C175.1 J1.1 SW1.1
VCCADC_0: U1.K11 | length 22.3
  Component Side w7: v1(1740.16,1952.76) U1.K11@1755.91,1968.5
XADC-AGND: R44.2 U1.K12 U1.L12 U1.M11 | length 66.8
  Component Side w7: v1(1740.16,1889.76) U1.M11@1755.91,1905.51 ; U1.L12@1787.4,1937.01 v1(1803.15,1952.76) ; U1.K12@1787.4,1968.5 v1(1803.15,1984.25)
pads on no net: C192.1 P1.12 SW1.0 SW1.3 U1.A1 U1.A2 U1.A3 U1.A4 U1.A6 U1.A7 U1.A8 U1.A9 U1.A11 U1.A12 U1.A13 U1.A14 U1.A16 U1.A17 U1.A18 U1.A19 U1.A21 U1.A22 U1.AA4 U1.AA6 U1.AA7 U1.AA8 U1.AA9 U1.AA11 U1.AA12 U1.AA13 U1.AA14 U1.AA16 U1.AA17 U1.AA18 U1.AA19 U1.AA21 U1.AA22 U1.AB1 U1.AB2 U1.AB4 U1.AB5 U1.AB6 U1.AB7 U1.AB9 U1.AB10 U1.AB11 U1.AB12 U1.AB14 U1.AB15 U1.AB16 U1.AB17 U1.AB19 U1.AB20 U1.AB21 U1.AB22 U1.B4 U1.B5 U1.B6 U1.B7 U1.B9 U1.B10 U1.B11 U1.B12 U1.B14 U1.B15 U1.B16 U1.B17 U1.B19 U1.B20 U1.B21 U1.B22 U1.C4 U1.C5 U1.C7 U1.C8 U1.C9 U1.C10 U1.C12 U1.C13 U1.C14 U1.C15 U1.C17 U1.C18 U1.C19 U1.C20 U1.C22 U1.D5 U1.D6 U1.D7 U1.D8 U1.D10 U1.D11 U1.D12 U1.D13 U1.D15 U1.D16 U1.D17 U1.D18 U1.D20 U1.D21 U1.D22 U1.E4 U1.E5 U1.E6 U1.E8 U1.E9 U1.E10 U1.E11 U1.E13 U1.E14 U1.E15 U1.E16 U1.E18 U1.E19 U1.E20 U1.E21 U1.F6 U1.F7 U1.F8 U1.F9 U1.F11 U1.F12 U1.F13 U1.F14 U1.F16 U1.F17 U1.F18 U1.F19 U1.F21 U1.F22 U1.G6 U1.G7 U1.G13 U1.G15 U1.G16 U1.G17 U1.G19 U1.G20 U1.G21 U1.G22 U1.H10 U1.H15 U1.H17 U1.H18 U1.H19 U1.H20 U1.H22 U1.J15 U1.J16 U1.J17 U1.J18 U1.J20 U1.J21 U1.J22 U1.K15 U1.K16 U1.K18 U1.K19 U1.K20 U1.K21 U1.L16 U1.L17 U1.L18 U1.L19 U1.L21 U1.L22 U1.M15 U1.M16 U1.M17 U1.M19 U1.M20 U1.M21 U1.M22 U1.N15 U1.N17 U1.N18 U1.N19 U1.N20 U1.N22 U1.P15 U1.P16 U1.P17 U1.P18 U1.P20 U1.P21 U1.P22 U1.R6 U1.R7 U1.R15 U1.R16 U1.R18 U1.R19 U1.R20 U1.R21 U1.T4 U1.T6 U1.T16 U1.T17 U1.T18 U1.T19 U1.T21 U1.T22 U1.U4 U1.U5 U1.U6 U1.U7 U1.U9 U1.U10 U1.U11 U1.U12 U1.U14 U1.U15 U1.U16 U1.U17 U1.U19 U1.U20 U1.U21 U1.U22 U1.V4 U1.V5 U1.V7 U1.V8 U1.V9 U1.V10 U1.V12 U1.V13 U1.V14 U1.V15 U1.V17 U1.V18 U1.V19 U1.V20 U1.V22 U1.W5 U1.W6 U1.W7 U1.W8 U1.W10 U1.W11 U1.W12 U1.W13 U1.W15 U1.W16 U1.W17 U1.W18 U1.W20 U1.W21 U1.W22 U1.Y4 U1.Y5 U1.Y6 U1.Y8 U1.Y9 U1.Y10 U1.Y11 U1.Y13 U1.Y14 U1.Y15 U1.Y16 U1.Y18 U1.Y19 U1.Y20 U1.Y21 U4.6 U4.28 U5.7 U7.4 U7.8 U7.15 U7.17 U7.18 U9.4 U9.8 U9.15 U9.17 U9.18 U10.J1 U10.J9 U10.L1 U10.L9 U10.M7 U11.J1 U11.J9 U11.L1 U11.L9 U11.M7
copper on no net: | length 5768.2
  Component Side w7: v1(1425.2,1574.8) 1440.94,1590.55 ; v1(1425.2,2267.72) 1440.94,2251.97 ; v1(1456.69,1574.8) 1472.44,1590.55 ; v1(1456.69,2267.72) 1472.44,2251.97 ; v1(1488.19,2267.72) 1503.94,2251.97 ; v1(1519.69,1574.8) 1535.43,1590.55 ; v1(1519.69,1606.3) 1535.43,1622.05 ; v1(1519.69,1637.8) 1535.43,1653.54 ; v1(1519.69,1700.79) 1535.43,1716.54 ; v1(1519.69,1732.28) 1535.43,1748.03 ; v1(1519.69,1763.78) 1535.43,1779.53 ; v1(1519.69,2141.73) 1535.43,2125.98 ; v1(1519.69,2204.72) 1535.43,2188.98 ; v1(1519.69,2236.22) 1535.43,2220.47 ; v1(1519.69,2267.72) 1535.43,2251.97 ; v1(1551.18,1574.8) 1566.93,1590.55 ; v1(1551.18,1637.8) 1566.93,1653.54 ; v1(1551.18,1669.29) 1566.93,1685.04 ; v1(1551.18,1700.79) 1566.93,1716.54 ; v1(1551.18,1732.28) 1566.93,1748.03 ; v1(1551.18,2141.73) 1566.93,2125.98 ; v1(1551.18,2173.23) 1566.93,2157.48 ; v1(1551.18,2204.72) 1566.93,2188.98 ; v1(1551.18,2236.22) 1566.93,2220.47 ; v1(1582.68,1574.8) 1598.43,1590.55 ; v1(1582.68,1606.3) 1598.43,1622.05 ; v1(1582.68,1637.8) 1598.43,1653.54 ; v1(1582.68,1669.29) 1598.43,1685.04 ; v1(1582.68,1732.28) 1598.43,1748.03 ; v1(1582.68,1763.78) 1598.43,1779.53 ; v1(1582.68,1795.28) 1598.43,1811.02 ; v1(1582.68,2078.74) 1598.43,2062.99 ; v1(1582.68,2110.24) 1598.43,2094.49 ; v1(1582.68,2141.73) 1598.43,2125.98 ; v1(1582.68,2173.23) 1598.43,2157.48 ; v1(1582.68,2236.22) 1598.43,2220.47 ; v1(1582.68,2267.72) 1598.43,2251.97 ; v1(1614.17,1574.8) 1629.92,1590.55 ; v1(1614.17,1606.3) 1629.92,1622.05 ; v1(1614.17,1669.29) 1629.92,1685.04 ; v1(1614.17,1700.79) 1629.92,1716.54 ; v1(1614.17,1732.28) 1629.92,1748.03 ; v1(1614.17,1795.28) 1629.92,1811.02 ; v1(1614.17,2078.74) 1629.92,2062.99 ; v1(1614.17,2110.24) 1629.92,2094.49 ; v1(1614.17,2173.23) 1629.92,2157.48 ; v1(1614.17,2204.72) 1629.92,2188.98 ; v1(1614.17,2236.22) 1629.92,2220.47 ; v1(1614.17,2267.72) 1629.92,2251.97 ; v1(1645.67,1606.3) 1661.42,1622.05 ; v1(1645.67,1637.8) 1661.42,1653.54 ; v1(1645.67,1669.29) 1661.42,1685.04 ; v1(1645.67,1700.79) 1661.42,1716.54 ; v1(1645.67,2110.24) 1661.42,2094.49 ; v1(1645.67,2141.73) 1661.42,2125.98 ; v1(1645.67,2173.23) 1661.42,2157.48 ; v1(1645.67,2204.72) 1661.42,2188.98 ; v1(1645.67,2267.72) 1661.42,2251.97 ; v1(1677.17,1574.8) 1692.91,1590.55 ; v1(1677.17,1606.3) 1692.91,1622.05 ; v1(1677.17,1637.8) 1692.91,1653.54 ; v1(1677.17,1700.79) 1692.91,1716.54 ; v1(1677.17,1732.28) 1692.91,1748.03 ; v1(1677.17,2110.24) 1692.91,2094.49 ; v1(1677.17,2141.73) 1692.91,2125.98 ; v1(1677.17,2204.72) 1692.91,2188.98 ; v1(1677.17,2236.22) 1692.91,2220.47 ; v1(1677.17,2267.72) 1692.91,2251.97 ; v1(1708.66,1574.8) 1724.41,1590.55 ; v1(1708.66,1637.8) 1724.41,1653.54 ; v1(1708.66,1669.29) 1724.41,1685.04 ; v1(1708.66,1700.79) 1724.41,1716.54 ; v1(1708.66,1732.28) 1724.41,1748.03 ; v1(1708.66,2047.24) 1724.41,2031.5 ; v1(1708.66,2141.73) 1724.41,2125.98 ; v1(1708.66,2173.23) 1724.41,2157.48 ; v1(1708.66,2204.72) 1724.41,2188.98 ; v1(1708.66,2236.22) 1724.41,2220.47 ; v1(1740.16,1574.8) 1755.91,1590.55 ; v1(1740.16,1606.3) 1755.91,1622.05 ; v1(1740.16,1637.8) 1755.91,1653.54 ; v1(1740.16,1669.29) 1755.91,1685.04 ; v1(1740.16,1732.28) 1755.91,1748.03 ; v1(1740.16,2110.24) 1755.91,2094.49 ; v1(1740.16,2141.73) 1755.91,2125.98 ; v1(1740.16,2173.23) 1755.91,2157.48 ; v1(1740.16,2236.22) 1755.91,2220.47 ; v1(1740.16,2267.72) 1755.91,2251.97 ; 1787.4,1590.55 v1(1803.15,1574.8) ; 1787.4,1622.05 v1(1803.15,1606.3) ; 1787.4,1685.04 v1(1803.15,1669.29) ; 1787.4,1716.54 v1(1803.15,1700.79) ; 1787.4,1748.03 v1(1803.15,1732.28) ; 1787.4,2094.49 v1(1803.15,2110.24) ; 1787.4,2157.48 v1(1803.15,2173.23) ; 1787.4,2188.98 v1(1803.15,2204.72) ; 1787.4,2220.47 v1(1803.15,2236.22) ; 1787.4,2251.97 v1(1803.15,2267.72) ; 1818.9,1622.05 v1(1834.65,1606.3) ; 1818.9,1653.54 v1(1834.65,1637.8) ; 1818.9,1685.04 v1(1834.65,1669.29) ; 1818.9,1716.54 v1(1834.65,1700.79) ; 1818.9,2062.99 v1(1834.65,2078.74) ; 1818.9,2094.49 v1(1834.65,2110.24) ; 1818.9,2125.98 v1(1834.65,2141.73) ; 1818.9,2157.48 v1(1834.65,2173.23) ; 1818.9,2188.98 v1(1834.65,2204.72) ; 1818.9,2251.97 v1(1834.65,2267.72) ; 1850.39,1590.55 v1(1866.14,1574.8) ; 1850.39,1622.05 v1(1866.14,1606.3) ; 1850.39,1653.54 v1(1866.14,1637.8) ; 1850.39,1716.54 v1(1866.14,1700.79) ; 1850.39,1748.03 v1(1866.14,1732.28) ; 1850.39,2094.49 v1(1866.14,2110.24) ; 1850.39,2125.98 v1(1866.14,2141.73) ; 1850.39,2188.98 v1(1866.14,2204.72) ; 1850.39,2220.47 v1(1866.14,2236.22) ; 1850.39,2251.97 v1(1866.14,2267.72) ; 1881.89,1590.55 v1(1897.64,1574.8) ; 1881.89,1653.54 v1(1897.64,1637.8) ; 1881.89,1685.04 v1(1897.64,1669.29) ; 1881.89,1716.54 v1(1897.64,1700.79) ; 1881.89,1748.03 v1(1897.64,1732.28) ; 1881.89,1811.02 v1(1897.64,1795.28) ; 1881.89,1842.52 v1(1897.64,1826.77) ; 1881.89,1874.02 v1(1897.64,1858.27) ; 1881.89,1905.51 v1(1897.64,1889.76) ; 1881.89,1968.5 v1(1897.64,1984.25) ; 1881.89,2000 v1(1897.64,2015.75) ; 1881.89,2031.5 v1(1897.64,2047.24) ; 1881.89,2062.99 v1(1897.64,2078.74) ; 1881.89,2125.98 v1(1897.64,2141.73) ; 1881.89,2157.48 v1(1897.64,2173.23) ; 1881.89,2188.98 v1(1897.64,2204.72) ; 1881.89,2220.47 v1(1897.64,2236.22) ; 1913.39,1590.55 v1(1929.13,1574.8) ; 1913.39,1622.05 v1(1929.13,1606.3) ; 1913.39,1653.54 v1(1929.13,1637.8) ; 1913.39,1685.04 v1(1929.13,1669.29) ; 1913.39,1748.03 v1(1929.13,1732.28) ; 1913.39,1779.53 v1(1929.13,1763.78) ; 1913.39,1811.02 v1(1929.13,1795.28) ; 1913.39,1842.52 v1(1929.13,1826.77) ; 1913.39,1905.51 v1(1929.13,1889.76) ; 1913.39,1937.01 v1(1929.13,1952.76) ; 1913.39,1968.5 v1(1929.13,1984.25) ; 1913.39,2000 v1(1929.13,2015.75) ; 1913.39,2062.99 v1(1929.13,2078.74) ; 1913.39,2094.49 v1(1929.13,2110.24) ; 1913.39,2125.98 v1(1929.13,2141.73) ; 1913.39,2157.48 v1(1929.13,2173.23) ; 1913.39,2220.47 v1(1929.13,2236.22) ; 1913.39,2251.97 v1(1929.13,2267.72) ; 1944.88,1590.55 v1(1960.63,1574.8) ; 1944.88,1622.05 v1(1960.63,1606.3) ; 1944.88,1685.04 v1(1960.63,1669.29) ; 1944.88,1716.54 v1(1960.63,1700.79) ; 1944.88,1748.03 v1(1960.63,1732.28) ; 1944.88,1779.53 v1(1960.63,1763.78) ; 1944.88,1842.52 v1(1960.63,1826.77) ; 1944.88,1874.02 v1(1960.63,1858.27) ; 1944.88,1905.51 v1(1960.63,1889.76) ; 1944.88,1937.01 v1(1960.63,1952.76) ; 1944.88,2000 v1(1960.63,2015.75) ; 1944.88,2031.5 v1(1960.63,2047.24) ; 1944.88,2062.99 v1(1960.63,2078.74) ; 1944.88,2094.49 v1(1960.63,2110.24) ; 1944.88,2157.48 v1(1960.63,2173.23) ; 1944.88,2188.98 v1(1960.63,2204.72) ; 1944.88,2220.47 v1(1960.63,2236.22) ; 1944.88,2251.97 v1(1960.63,2267.72) ; 1976.38,1622.05 v1(1992.13,1606.3) ; 1976.38,1653.54 v1(1992.13,1637.8) ; 1976.38,1685.04 v1(1992.13,1669.29) ; 1976.38,1716.54 v1(1992.13,1700.79) ; 1976.38,1779.53 v1(1992.13,1763.78) ; 1976.38,1811.02 v1(1992.13,1795.28) ; 1976.38,1842.52 v1(1992.13,1826.77) ; 1976.38,1874.02 v1(1992.13,1858.27) ; 1976.38,1937.01 v1(1992.13,1952.76) ; 1976.38,1968.5 v1(1992.13,1984.25) ; 1976.38,2000 v1(1992.13,2015.75) ; 1976.38,2031.5 v1(1992.13,2047.24) ; 1976.38,2094.49 v1(1992.13,2110.24) ; 1976.38,2125.98 v1(1992.13,2141.73) ; 1976.38,2157.48 v1(1992.13,2173.23) ; 1976.38,2188.98 v1(1992.13,2204.72) ; 1976.38,2251.97 v1(1992.13,2267.72) ; 2007.87,1590.55 v1(2023.62,1574.8) ; 2007.87,1622.05 v1(2023.62,1606.3) ; 2007.87,1653.54 v1(2023.62,1637.8) ; 2007.87,1716.54 v1(2023.62,1700.79) ; 2007.87,1748.03 v1(2023.62,1732.28) ; 2007.87,1779.53 v1(2023.62,1763.78) ; 2007.87,1811.02 v1(2023.62,1795.28) ; 2007.87,1874.02 v1(2023.62,1858.27) ; 2007.87,1905.51 v1(2023.62,1889.76) ; 2007.87,1937.01 v1(2023.62,1952.76) ; 2007.87,1968.5 v1(2023.62,1984.25) ; 2007.87,2031.5 v1(2023.62,2047.24) ; 2007.87,2062.99 v1(2023.62,2078.74) ; 2007.87,2094.49 v1(2023.62,2110.24) ; 2007.87,2125.98 v1(2023.62,2141.73) ; 2007.87,2188.98 v1(2023.62,2204.72) ; 2007.87,2220.47 v1(2023.62,2236.22) ; 2007.87,2251.97 v1(2023.62,2267.72) ; 2039.37,1590.55 v1(2055.12,1574.8) ; 2039.37,1653.54 v1(2055.12,1637.8) ; 2039.37,1685.04 v1(2055.12,1669.29) ; 2039.37,1716.54 v1(2055.12,1700.79) ; 2039.37,1748.03 v1(2055.12,1732.28) ; 2039.37,1811.02 v1(2055.12,1795.28) ; 2039.37,1842.52 v1(2055.12,1826.77) ; 2039.37,1874.02 v1(2055.12,1858.27) ; 2039.37,1905.51 v1(2055.12,1889.76) ; 2039.37,1968.5 v1(2055.12,1984.25) ; 2039.37,2000 v1(2055.12,2015.75) ; 2039.37,2031.5 v1(2055.12,2047.24) ; 2039.37,2062.99 v1(2055.12,2078.74) ; 2039.37,2125.98 v1(2055.12,2141.73) ; 2039.37,2157.48 v1(2055.12,2173.23) ; 2039.37,2188.98 v1(2055.12,2204.72) ; 2039.37,2220.47 v1(2055.12,2236.22) ; 2070.87,1590.55 v1(2086.61,1574.8) ; 2070.87,1622.05 v1(2086.61,1606.3) ; 2070.87,1653.54 v1(2086.61,1637.8) ; 2070.87,1685.04 v1(2086.61,1669.29) ; 2070.87,1748.03 v1(2086.61,1732.28) ; 2070.87,1779.53 v1(2086.61,1763.78) ; 2070.87,1811.02 v1(2086.61,1795.28) ; 2070.87,1842.52 v1(2086.61,1826.77) ; 2070.87,1905.51 v1(2086.61,1889.76) ; 2070.87,1937.01 v1(2086.61,1952.76) ; 2070.87,1968.5 v1(2086.61,1984.25) ; 2070.87,2000 v1(2086.61,2015.75) ; 2070.87,2062.99 v1(2086.61,2078.74) ; 2070.87,2094.49 v1(2086.61,2110.24) ; 2070.87,2125.98 v1(2086.61,2141.73) ; 2070.87,2157.48 v1(2086.61,2173.23) ; 2070.87,2220.47 v1(2086.61,2236.22) ; 2070.87,2251.97 v1(2086.61,2267.72) ; 2102.36,1590.55 v1(2118.11,1574.8) ; 2102.36,1622.05 v1(2118.11,1606.3) ; 2102.36,1685.04 v1(2118.11,1669.29) ; 2102.36,1716.54 v1(2118.11,1700.79) ; 2102.36,1748.03 v1(2118.11,1732.28) ; 2102.36,1779.53 v1(2118.11,1763.78) ; 2102.36,1842.52 v1(2118.11,1826.77) ; 2102.36,1874.02 v1(2118.11,1858.27) ; 2102.36,1905.51 v1(2118.11,1889.76) ; 2102.36,1937.01 v1(2118.11,1952.76) ; 2102.36,2000 v1(2118.11,2015.75) ; 2102.36,2031.5 v1(2118.11,2047.24) ; 2102.36,2062.99 v1(2118.11,2078.74) ; 2102.36,2094.49 v1(2118.11,2110.24) ; 2102.36,2157.48 v1(2118.11,2173.23) ; 2102.36,2188.98 v1(2118.11,2204.72) ; 2102.36,2220.47 v1(2118.11,2236.22) ; 2102.36,2251.97 v1(2118.11,2267.72)

## Polygon pours and split planes (outlines as drawn)
no net on Ground Plane 1 (GND) (split plane): 5979.9,20.1 20.1,20.1 20.1,3979.9 5979.9,3979.9
no net on Power Plane (VCC) (split plane): 5979.9,20.1 20.1,20.1 20.1,3979.9 5979.9,3979.9
no net on Ground Plane 2 (GND) (split plane): 5979.9,20.1 20.1,20.1 20.1,3979.9 5979.9,3979.9

## Text inside footprints (layer, text, board x,y; h text height)
P1: Top Overlay "1" at 19769.37,1435 h40 r270